# EAGLE board Modulo ISD Voicer (EAGLE 4.09)
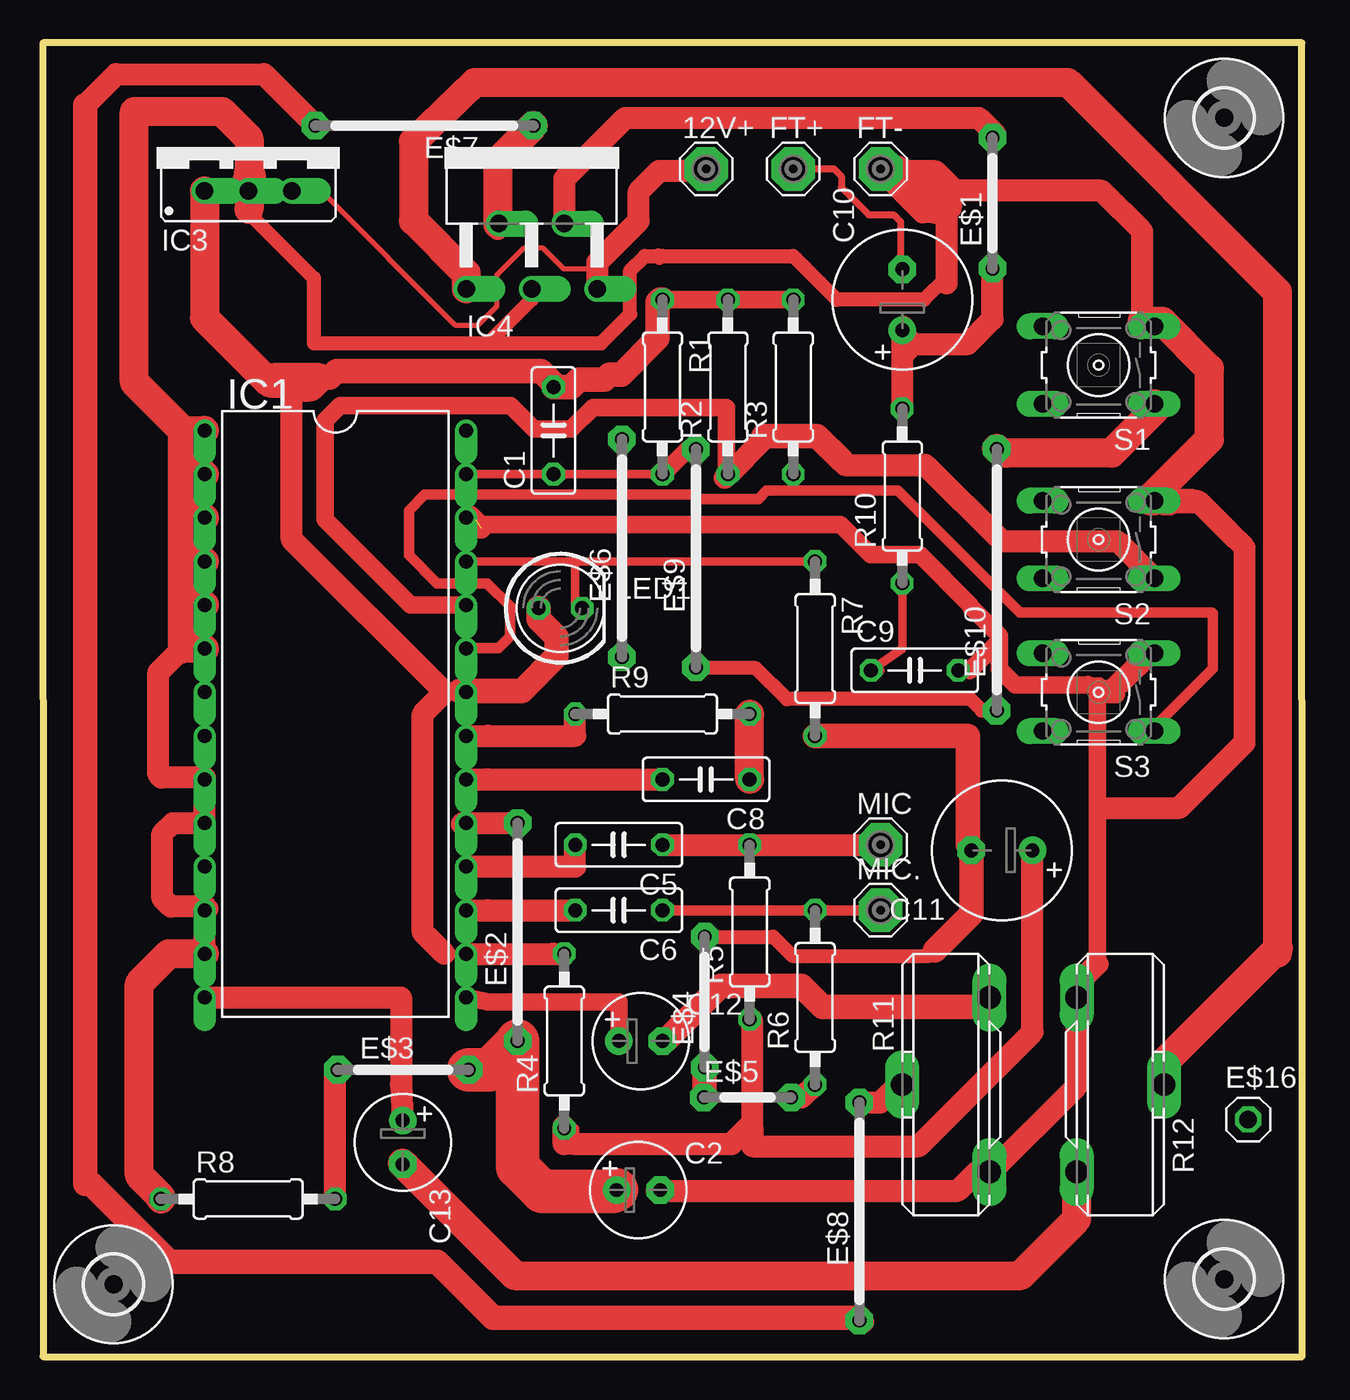
[diagram p0: board, top side]

Size 73.35 x 76.52 mm. Coordinates in mm from the lower left corner, seen from the top.
Outline: 0.01,0 73.35,0 73.34,76.52 0,76.52 0.01,0
Copper layers used: Top
tRestrict: 1605 lines

## Footprints (pad centres in the part's own frame; a part is rotated, then mirrored left to right if it is on the bottom)
SE14 = drill 1.397 pad 2.54 octagon: MP 0,0
C050-025X075 = drill 0.813 octagon: 1 -2.54,0; 2 2.54,0
E2,5-6 = drill 0.813 pad 1.6 round: + -1.27,0 | drill 0.813 pad 1.6 octagon: - 1.27,0
E3,5-8 = drill 0.813 pad 1.6 round: + -1.778,0 | drill 0.813 pad 1.6 octagon: - 1.778,0
07 = drill 0.813 pad 1.6 octagon: 1 -3.81,0; 2 3.81,0
12 = drill 0.813 pad 1.6 octagon: 1 -6.35,0; 2 6.35,0
05 = drill 0.813 pad 1.6 octagon: 1 -2.54,0; 2 2.54,0
15 = drill 0.813 pad 1.6 octagon: 1 -7.62,0; 2 7.62,0
3,3 = hole 3.3: 0,0
1X01 = drill 1.016 octagon: 1 0,0
DIL28-6 = drill 0.813 offset: 1 -16.51,-7.62; 2 -13.97,-7.62; 3 -11.43,-7.62; 4 -8.89,-7.62; 5 -6.35,-7.62; 6 -3.81,-7.62; 7 -1.27,-7.62; 8 1.27,-7.62; 9 3.81,-7.62; 10 6.35,-7.62; 11 8.89,-7.62; 12 11.43,-7.62; 13 13.97,-7.62; 14 16.51,-7.62; 15 16.51,7.62; 16 13.97,7.62; 17 11.43,7.62; 18 8.89,7.62; 19 6.35,7.62; 20 3.81,7.62; 21 1.27,7.62; 22 -1.27,7.62; 23 -3.81,7.62; 24 -6.35,7.62; 25 -8.89,7.62; 26 -11.43,7.62; 27 -13.97,7.62; 28 -16.51,7.62
78XXS = drill 1.016 offset: GND 0,-2.54; IN -2.54,-2.54; OUT 2.54,-2.54
CB360 = drill 1.016 offset: 1 -3.81,-8.255; 2 -1.905,-4.445; 3 0,-8.255; 4 1.905,-4.445; 5 3.81,-8.255
LED5MM = drill 0.813 octagon: A -1.27,0; K 1.27,0
0207/10 = drill 0.813 octagon: 1 -5.08,0; 2 5.08,0
ST15 = drill 1.321 long: A -5.08,-2.54; E 5.08,-2.54; S 0,2.54
B3F-10XX = drill 1.016 long: 1 -3.251,2.261; 2 3.251,2.261; 3 -3.251,-2.261; 4 3.251,-2.261

## Placement (x,y rotation side)
12V+  SE14  [SE14]  38.63,69.18 0 top
C1  1nF  [C050-025X075]  29.74,53.94 90 top
C2  4,7uF  [E2,5-6]  34.69,9.7 0 top
C5  100nF  [C050-025X075]  33.55,29.81 180 top
C6  100nF  [C050-025X075]  33.55,26 180 top
C8  100nF  [C050-025X075]  38.63,33.62 180 top
C9  100nF  [C050-025X075]  50.78,39.97 0 top
C10  100uF  [E3,5-8]  50.06,61.56 90 top
C11  220uF  [E3,5-8]  55.86,29.49 180 top
C12  10uF  [E2,5-6]  34.82,18.38 0 top
C13  10uF  [E2,5-6]  20.96,12.48 270 top
E$1  [07]  55.32,67.19 90 top
E$2  [12]  27.65,24.73 90 top
E$3  [07]  20.99,16.71 0 top
E$4  [07]  38.55,20.65 90 top
E$5  [05]  41.04,15.09 0 top
E$6  [12]  33.73,47.09 90 top
E$7  [12]  22.22,71.7 180 top
E$8  [12]  47.56,8.45 90 top
E$9  [12]  38.04,46.5 90 top
E$10  [15]  55.56,45.25 90 top
E$11  [3,3]  68.81,72.16 0 top
E$12  [3,3]  68.81,4.51 0 top
E$13  [3,3]  4.11,4.21 0 top
E$16  [1X01]  70.21,13.81 0 top
FT+  SE14  [SE14]  43.71,69.18 0 top
FT-  SE14  [SE14]  48.79,69.18 0 top
IC1  ISD1420  [DIL28-6]  17.04,37.43 270 top
IC3  TIP 7805  [78XXS]  11.96,70.45 0 top
IC4  TDA2003V  [CB360]  28.47,70.45 0 top
LED1  LED MONITOR  [LED5MM]  30.14,43.59 0 top
MIC  SE14  [SE14]  48.79,29.81 0 top
MIC.  SE14  [SE14]  48.79,26 0 top
R1  100K  [0207/10]  36.09,56.48 270 top
R2  100K  [0207/10]  39.9,56.48 90 top
R3  100K  [0207/10]  43.71,56.48 90 top
R4  1K  [0207/10]  30.37,18.38 90 top
R5  10K  [0207/10]  41.17,24.73 90 top
R6  10K  [0207/10]  44.98,20.92 90 top
R7  1K  [0207/10]  44.98,41.24 270 top
R8  470K  [0207/10]  11.95,9.18 0 top
R9  4K7  [0207/10]  36.09,37.43 0 top
R10  100R  [0207/10]  50.06,50.13 90 top
R11  1K  [ST15]  52.6,15.84 90 top
R12  1K  [ST15]  62.76,15.84 270 top
S1  REC  [B3F-10XX]  61.49,57.75 180 top
S2  PE  [B3F-10XX]  61.49,47.59 180 top
S3  PL  [B3F-10XX]  61.49,38.7 180 top

## Library data of the parts
12V+ FT+ FT- MIC MIC. = solpad
C1 C2 C5 C6 C8-C13 R1-R10 = rcl
E$1-E$10 = jumper
E$11-E$13 = holes
E$16 = pinhead
IC1 = dil
IC3 = v-reg
IC4 = linear
LED1 = led
R11 R12 = pot
S1-S3 = switch-omron

## Nets
56: C6.1 MIC..MP R6.2
+5V: C1.2 IC1.16 IC1.22 IC3.IN LED1.A R1.1 R2.2 R3.2 R4.2
+12V: 12V+.MP IC3.OUT IC4.5
N$1: C12.- R11.E
N$2: C1.1 E$9.2 IC1.27 R1.2
N$3: IC1.24 R2.1 S2.1
N$4: IC1.23 R3.1 S3.1
N$5: C13.+ IC1.14
N$6: C12.+ IC1.15
N$7: C13.- R12.E
N$8: C10.+ E$1.1 R10.2
N$9: C2.+ E$2.1 E$3.2
N$10: C9.1 R10.1
N$11: IC1.21 R9.1
N$12: C8.1 R9.2
N$13: C10.- FT+.MP
N$14: E$7.1 IC4.2
N$15: IC4.1 R12.S
N$16: C8.2 IC1.20
N$30: C5.2 IC1.18
N$31: C6.2 IC1.17
N$34: C11.- E$4.2 R7.2
N$35: IC1.25 LED1.K R7.1
N$38: C11.+ R4.1 R5.1
N$39: C5.1 MIC.MP R5.2
PE: C2.- C9.2 FT-.MP IC1.1 IC1.2 IC1.3 IC1.4 IC1.5 IC1.6 IC1.9 IC1.10 IC1.12 IC1.13 IC1.26 IC3.GND IC4.3 R8.1 R11.A R12.A S1.3 S2.3 S3.3
S$1: E$1.2 IC4.4
S$2: E$2.2 IC1.19
S$3: E$3.1 R8.2
S$4: E$4.1 E$5.1
S$5: E$5.2 R6.1
S$6: E$7.2 E$8.1
S$7: E$8.2 R11.S
S$8: E$9.1 E$10.1
S$9: E$10.2 S1.1

## Tracks (layer width: path | path; a pad name or v marks a point on that pad's centre or on a via)
56
  Top 0.508: C6.1 | MIC..MP | R6.2
  Top 0.61: C6.1 R6.2 MIC..MP
+5V
  Top 0.508: 23.39,23.46 IC1.16 | 23.39,38.7 IC1.22 | R1.1 | R3.2 | R2.2 | C1.2
  Top 1.016: R1.1 R2.2 R3.2
  Top 1.27: IC1.16 25.93,23.46 29.74,23.46 R4.2 | 23.39,23.46 22.12,24.73 22.12,37.43 23.39,38.7 14.5,47.59 14.5,56.48
  Top 1.422: LED1.A 28.87,42.97 29.93,41.91 29.93,40.8 27.91,38.78 24.28,38.78 24.36,38.7 IC1.22 | 13.41,57.01 16.71,57.01 17.11,57.41 29.01,57.41 29.91,56.51 29.88,56.48 C1.2 30.78,56.48 31.21,56.91 32.71,56.91 33.01,57.21 33.71,57.21 35.81,59.31 35.81,61.41 35.96,61.56 R1.1
  Top 1.676: IC3.IN 9.42,60.5 13.21,56.71 14.51,56.71 14.5,56.7 14.5,56.48 15.58,56.48 16.11,57.01 13.41,57.01
+12V
  Top 0.305: IC3.OUT 16.2,67.91 24.02,60.09 25.36,60.09 26.45,61.18 26.45,63.01 28.03,64.59 29.11,64.59 30.33,63.37 32.27,63.37 32.27,63.73 34.7,66.16 34.7,67.74 34.58,67.86 34.7,67.86
  Top 1.27: IC4.5 32.28,63.73 34.7,66.15 34.7,66.16 34.7,67.86 35.91,69.07 38.82,69.07 38.71,69.18 12V+.MP
N$1
  Top 0.508: C12.-
  Top 1.422: C12.- 36.27,18.38 39.48,21.59 44.18,21.59 45.41,20.36 55.03,20.36 55.03,20.84 55.12,20.93 R11.E
N$2
  Top 0.508: R1.2 | C1.1 R1.2 | C1.1 | C1.1 25.93,51.4 IC1.27
  Top 1.016: R1.2 36.09,51.38 36.1,51.37 37.58,52.85 E$9.2
N$3
  Top 1.016: IC1.24 21.43,43.78 16.45,48.76 16.45,54.52 17.32,55.39 27.25,55.39 28.62,54.02 30.76,54.02 32.03,55.29 39.83,55.29 39.83,51.39 39.84,51.4 R2.1
  Top 1.27: S2.1 62.58,47.49 55.85,47.49 51.4,51.94 46.69,51.94 46.69,52.04 46.53,52.2 | 39.73,51.19 39.9,51.36 | 39.9,51.36 R2.1 | 41.98,53.63 41.98,53.44 39.9,51.36
  Top 1.422: 46.53,52.2 45.1,53.63 41.98,53.63
N$4
  Top 0.305: 68.08,43.35 68.14,43.29 | 43.73,51.29 43.71,51.31 R3.1 43.71,50.47 43.73,50.45 | 37.84,50.2 38.08,49.96 | 24.78,41.28 24.74,41.24 IC1.23
  Top 0.61: S3.1 64.74,36.67 68.14,40.07 68.14,43.29 | 68.08,43.35 56.9,43.35 49.8,50.45 43.73,50.45 | 43.73,50.45 43.73,51.29 | 43.73,50.45 42.16,50.45 41.67,49.96 38.08,49.96 | 37.84,50.2 22.23,50.2 21.32,49.29 21.32,46.68 22.96,45.04 25.88,45.04 27.21,43.71 27.21,41.95 26.54,41.28 24.78,41.28
N$5
  Top 1.27: IC1.14 10.69,20.92 20.85,20.92 20.85,15.84 C13.+
N$6
  Top 0.508: C12.+
  Top 1.016: C12.+ 33.55,20.66 25.93,20.66 IC1.15
N$7
  Top 1.676: R12.E 60.22,8 56.94,4.72 27.49,4.72 20.96,11.25 | 20.96,11.25 20.94,11.27 | C13.- 20.96,11.25
N$8
  Top 0.508: 50.06,59.02 C10.+ | R10.2
  Top 1.27: E$1.1 55.32,60.42 53.88,58.98 50.12,58.98 50.12,59.86 50.06,59.8 C10.+ | R10.2 50.06,59.02 | 50.06,59.02 50.06,59.93 50.12,59.99 50.12,58.85 50.37,58.6 50.37,59.35 50.24,59.48 50.06,59.3 50.06,59.02
N$9
  Top 2.54: E$3.2 26.03,16.71 27.65,18.33 E$2.1 27.65,11.06 29.07,9.64 33.24,9.64 33.3,9.7 C2.+
N$10
  Top 0.508: R10.1 50.06,41.24 C9.1 48.79,39.97 | R10.1
N$11
  Top 0.508: R9.1
  Top 1.27: R9.1 31.01,36.16 25.93,36.16 IC1.21
N$12
  Top 0.508: C8.1 | R9.2
  Top 1.676: C8.1 R9.2
N$13
  Top 0.406: FT+.MP 46.09,69.18 46.51,68.76 46.51,68.11 48.11,66.51 49.56,66.51 49.96,66.11 49.96,63.56 50.06,63.46 C10.-
N$14
  Top 1.27: 26.5,65.68 26.5,65.94 IC4.2
  Top 1.676: E$7.1 26.5,69.63 26.5,65.94
N$15
  Top 1.016: 71.91,23.51 71.96,23.56 71.96,23.78
  Top 1.27: 65.4,16 65.3,15.9 R12.S
  Top 1.676: IC4.1 24.66,63.09 21.59,66.16 21.59,70.78 25.16,74.23 59.69,74.23 71.91,62.01 71.91,23.51 | 71.96,23.78 65.4,17.22 65.4,16
N$16
  Top 0.508: C8.2
  Top 1.27: C8.2 25.93,33.62 IC1.20
N$30
  Top 0.508: C5.2
  Top 1.27: C5.2 31.01,28.54 25.93,28.54 IC1.18
N$31
  Top 0.508: C6.2
  Top 1.27: C6.2 25.93,26 IC1.17
N$34
  Top 0.508: C11.- 53.87,29.81 | R7.2
  Top 0.813: 51.97,23.67 51.97,23.66 51.65,23.34 43.65,23.34 42.54,24.45 38.68,24.45 38.55,24.58 E$4.2
  Top 1.422: R7.2 53.87,36.16 53.87,29.81 | C11.- 54.08,25.78 51.97,23.67
N$35
  Top 0.508: 31.01,46.32 25.93,46.32 IC1.25 | 31.01,46.32 31.01,43.78 LED1.K | 31.01,46.32 R7.1 | R7.1
N$38
  Top 0.508: 41.17,13.44 R5.1 | R5.1 | R4.1 31.01,13.3 31.01,12.39 31.01,12.03
  Top 1.27: R5.1 41.21,19.65 41.23,19.67 41.3,19.6 41.3,13.32 41.32,13.34 | C11.+ 57.64,18.89 51,12.25 41.32,12.25 41.32,13.34 | 41.32,13.34 41.32,13.43 | 41.17,13.44 40.12,12.39 31.01,12.39 30.33,12.39 30.33,13.43
N$39
  Top 0.508: C5.1 | MIC.MP | R5.2
  Top 1.27: C5.1 R5.2 MIC.MP
PE  (1 unrouted)
  Top 0.406: 12,68.16 11.88,68.04 11.88,67.92 12,67.8 12,68.29 11.88,68.41 11.88,68.52 | 11.96,68.94 11.96,69.18
  Top 0.508: 11.96,69.18 IC3.GND 11.96,66.64 | 50.06,69.18 FT-.MP | 64.03,60.29 S1.3
  Top 0.61: 36.02,64.1 36.09,64.1 | 54.03,43.68 54.03,43.76 | 55.72,41.83 55.72,41.99 | 61.43,38.56 61.43,38.42 63.97,40.96 | 62.54,38.56 64.93,40.95 | 60.87,39.12 61.57,38.42 61.57,39.26 60.87,39.26 | 62.83,39.12 60.73,39.12
  Top 0.813: 25.93,59.02 28.47,61.56 IC4.3 | 25.93,59.02 15.77,59.02 15.77,62.83 11.96,66.64 | 52.6,66.64 52.6,62.83 51.33,61.56 46.25,61.56 43.71,64.1 36.09,64.1 | 25.93,59.02 32.52,59.02 34.21,60.71 34.21,63.26 35.06,64.11 35.83,64.11 35.85,64.13 35.91,64.07 35.91,63.99 36.02,64.1 | 55.72,41.83 55.72,41.69 | 54,39.97 C9.2 | 60.87,39.12 60.73,39.12 60.87,39.26 | 64.67,40.96 S3.3 63.97,40.96 | R12.A 60.22,21.11 60.02,21.31 60.02,21.45 | 55.12,10.65 55.14,10.67 R11.A | 35.76,9.66 35.8,9.7 C2.-
  Top 1.016: 54.03,43.76 51.08,46.71 48.21,46.71 46.46,48.46 25.16,48.46 24.86,48.76 25.21,48.76 | 55.72,41.99 54.03,43.68 | S2.3 66.84,49.85 66.9,49.91 | 64.67,49.91 64.6,49.84 64.62,49.84 | 64.62,49.84 65.88,49.84 | 66.07,49.84 66.83,49.84 66.9,49.77 | 66.07,49.84 66.14,49.77 | 65.88,49.84 66.07,49.84 | 65.88,49.84 65.86,49.84 65.85,49.83 65.82,49.83 | 65.82,49.83 65.71,49.83 65.71,49.77 65.66,49.72 65.5,49.72 65.3,49.52 65.67,49.52 65.7,49.55 65.7,49.71 65.82,49.83 | 65.82,49.83 66.16,49.83 66.18,49.85 | 66.18,49.85 66.23,49.85 | 66.18,49.85 65.57,49.85 65.54,49.82 65.15,49.82 65.14,49.81 64.92,49.81 64.9,49.83 64.63,49.83 64.62,49.84 | 64.62,49.84 64.5,49.84 64.49,49.83 | 64.49,49.85 64.51,49.83 64.53,49.85 67.09,49.85 | 69.11,48.01 69.11,48.02 | 61.71,31.97 61.43,31.69 61.43,38.42 61.43,22.86 | 64.93,40.95 64.92,40.96 S3.3 | 61.43,38.56 62.54,38.56 | 55.72,41.69 54,39.97 | 55.72,41.83 55.72,40.06 56.66,39.12 60.73,39.12 | 64.67,40.96 62.83,39.12
  Top 1.27: 64.03,60.29 64.03,65.54 61.66,67.91 53.13,67.91 52.38,68.66 | 50.24,69.04 48.99,69.04 | 50.24,69.04 52,69.04 52.38,68.66 | 52.38,68.66 52.38,68.29 52.88,67.79 52.88,66.91 52.63,66.66 | 52.63,66.66 51.24,66.66 48.86,69.04 50.24,69.04 | 50.24,69.04 52,67.28 52.01,67.28 52.63,66.66 | 52.63,66.66 52.63,62.51 | 50.24,69.04 50.1,69.18 50.06,69.18 50.03,69.18 49.98,69.13 49.82,69.29 49.24,69.29 51.89,66.64 52.6,66.64 | 52.63,66.66 52.62,66.66 50.24,69.04 | IC1.6 8.11,41.24 6.72,39.85 6.72,33.91 6.9,33.73 9.45,33.73 9.42,33.7 IC1.9 9.42,31.11 9.39,31.08 | 9.39,31.08 9.2,30.89 | 9.39,31.08 IC1.10 7.58,31.08 6.96,30.46 6.96,26.71 7.45,26.22 9.45,26.22 9.57,26.1 9.47,26 IC1.12 IC1.13 | IC1.13 9.45,23.44 | IC1.13 | 64.67,49.91 66.9,49.91 | 66.14,49.77 66.9,49.77 | 64.49,49.83 67.3,49.83 69.11,48.02 | 69.11,48.01 70,47.12 70,35.77 66.2,31.97 61.71,31.97 | 60.02,21.45 61.43,22.86 | R12.A 60.22,15.75 55.14,10.67 | R11.A 54.39,10.76 53.29,9.66 35.76,9.66 | IC1.26 24.74,48.86 24.83,48.95 25.51,48.27
  Top 1.676: 8.15,43.78 8.15,41.24 IC1.6 | 8.15,46.32 8.15,48.86 | 8.15,43.78 8.15,46.32 | 8.15,43.78 IC1.5 | 8.15,46.32 IC1.4 | 8.15,51.4 8.15,53.94 | 8.15,53.94 IC1.1 | 8.15,48.86 8.15,51.4 | 8.15,48.86 IC1.3 | 8.15,51.4 IC1.2 | 8.15,53.94 5.33,56.76 5.33,72.53 10.42,72.53 12,70.95 12,68.16 | 12,67.8 12,66.83 | 11.96,68.94 12.13,68.77 11.88,68.52 | 64.03,60.29 65.22,60.29 67.95,57.56 67.95,53.43 64.43,49.91 64.49,49.85 S2.3 | IC1.13 7.35,23.47 5.61,21.73 5.61,10.56 6.87,9.3 R8.1
S$1
  Top 1.27: IC4.4 30.38,68.6 33.93,72.16 54.51,72.16 55.51,71.16 55.35,71 E$1.2
S$2
  Top 1.27: IC1.19 24.47,31.08 | 24.47,31.08 E$2.2 | 24.47,31.08 24.39,31
S$3
  Top 1.27: E$3.1 17.13,16.71 17.03,16.61 R8.2
S$4
  Top 0.813: E$5.1 38.55,15.09 38.62,15.02
  Top 1.422: 38.55,15.09 E$4.1
S$5
  Top 0.813: 44.93,15.84 R6.1
  Top 1.27: E$5.2 44.18,15.09 44.93,15.84
S$6
  Top 1.016: 47.56,2.26 47.64,2.18 47.64,2.14
  Top 1.27: E$7.2 15.87,71.72 12.88,74.71 4.26,74.71 2.45,72.9 | 47.68,2.1 47.78,2 | 47.68,2.1 E$8.1 | 47.64,2.14 47.68,2.1 | 2.45,10.07 2.8,10.07
  Top 1.422: 2.45,10.07 2.45,72.9 | 2.8,10.07 7.36,5.51 22.96,5.51 26.21,2.26 47.56,2.26
S$7
  Top 1.27: R11.S 49.92,15.84 49.86,15.9 48.76,14.8 E$8.2
S$8
  Top 0.813: E$10.1 54.69,37.63 54.03,38.29 43.33,38.29 41.52,40.1 38.04,40.1 E$9.1
S$9
  Top 1.016: 55.56,52.9 55.7,53.04 56.12,52.62
  Top 1.676: S1.1 64.74,55.12 62.24,52.62 56.12,52.62 | 55.56,52.9 E$10.2